# Altium PCB V4.pcbdoc
Units mil, origin at the board's own origin, x right, y up, seen from the top; angles counter-clockwise.
Board outline 3175 x 2617.79 mil, 2 copper layers (Top Layer, Bottom Layer); 52 components, 61 nets, 210 pads, 44 vias.
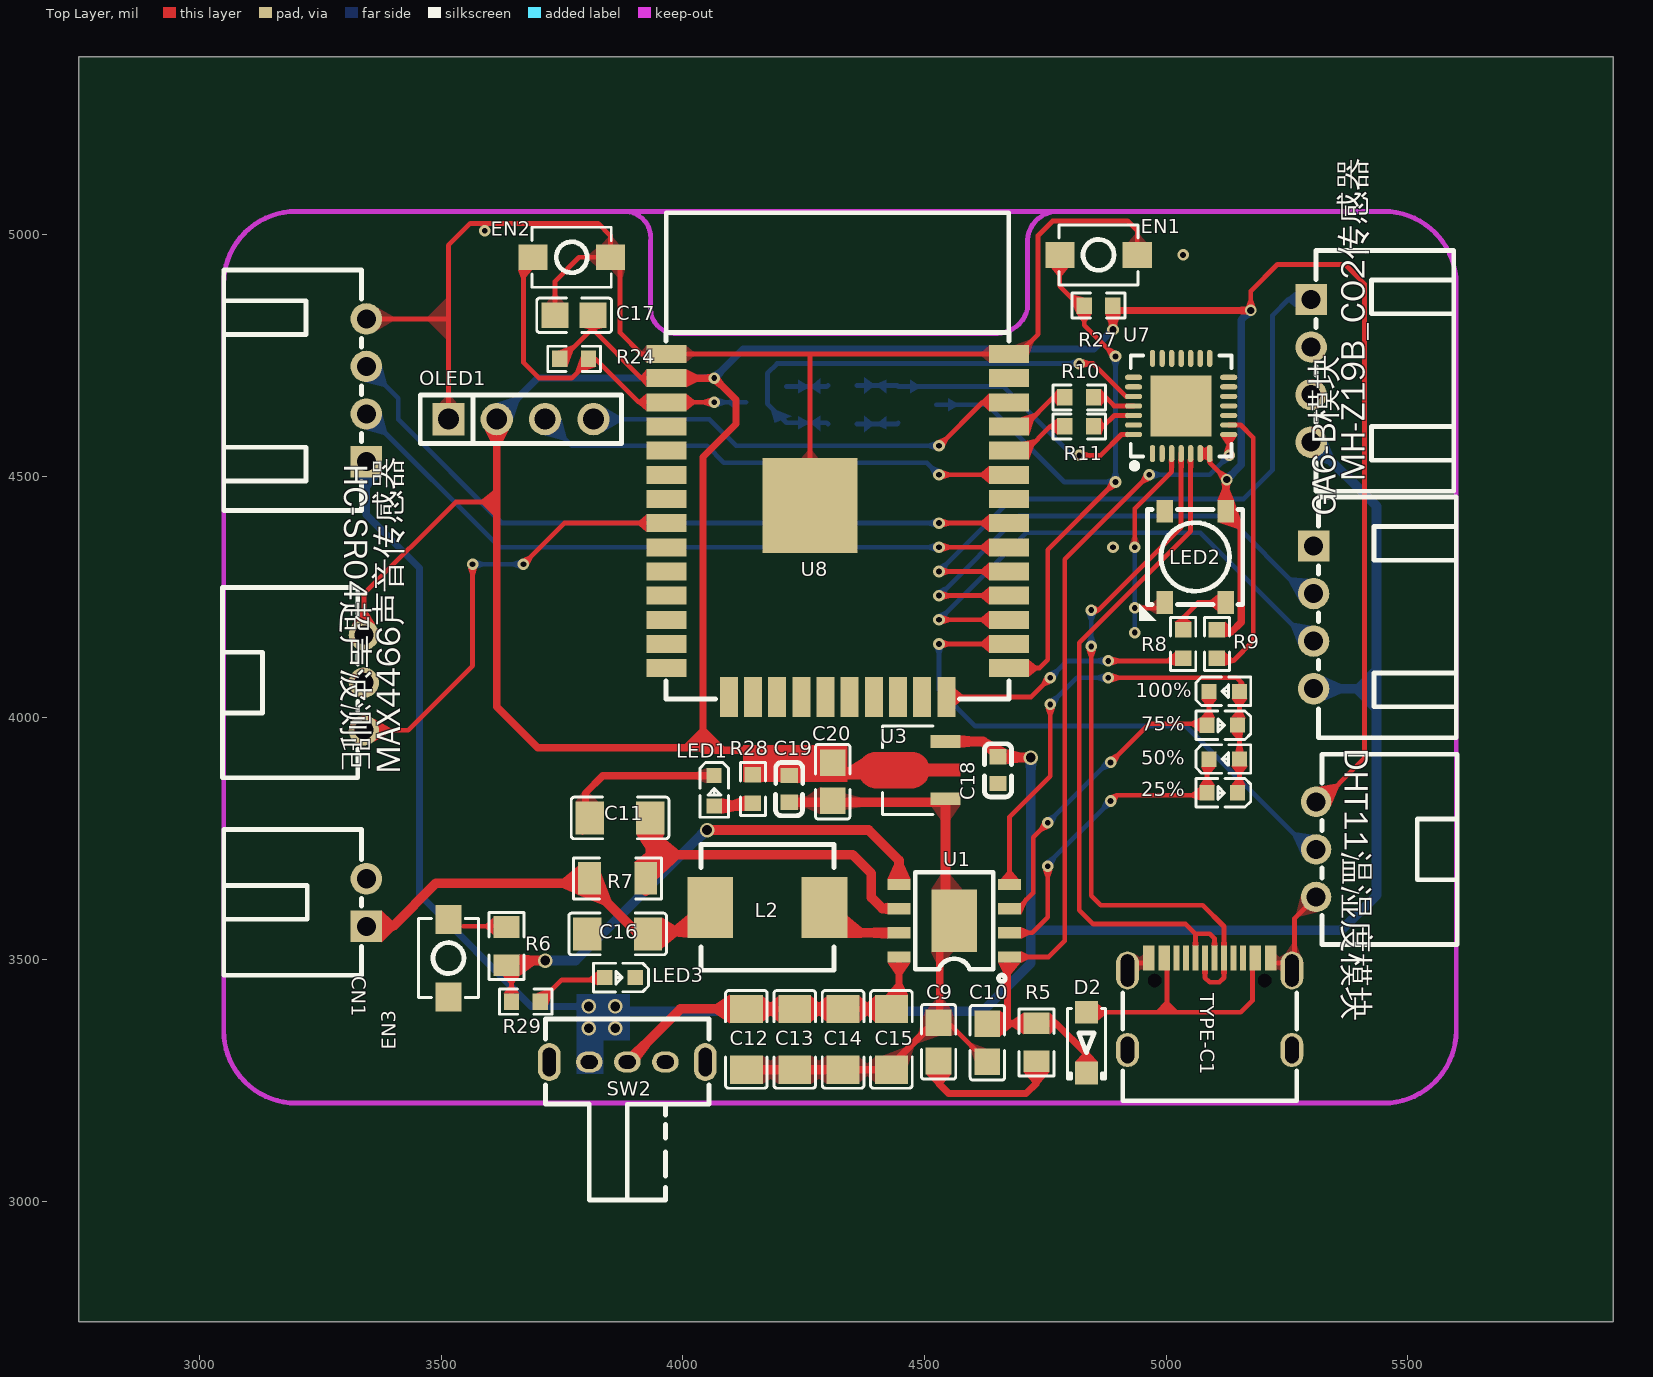
[diagram p0: Top Layer view]
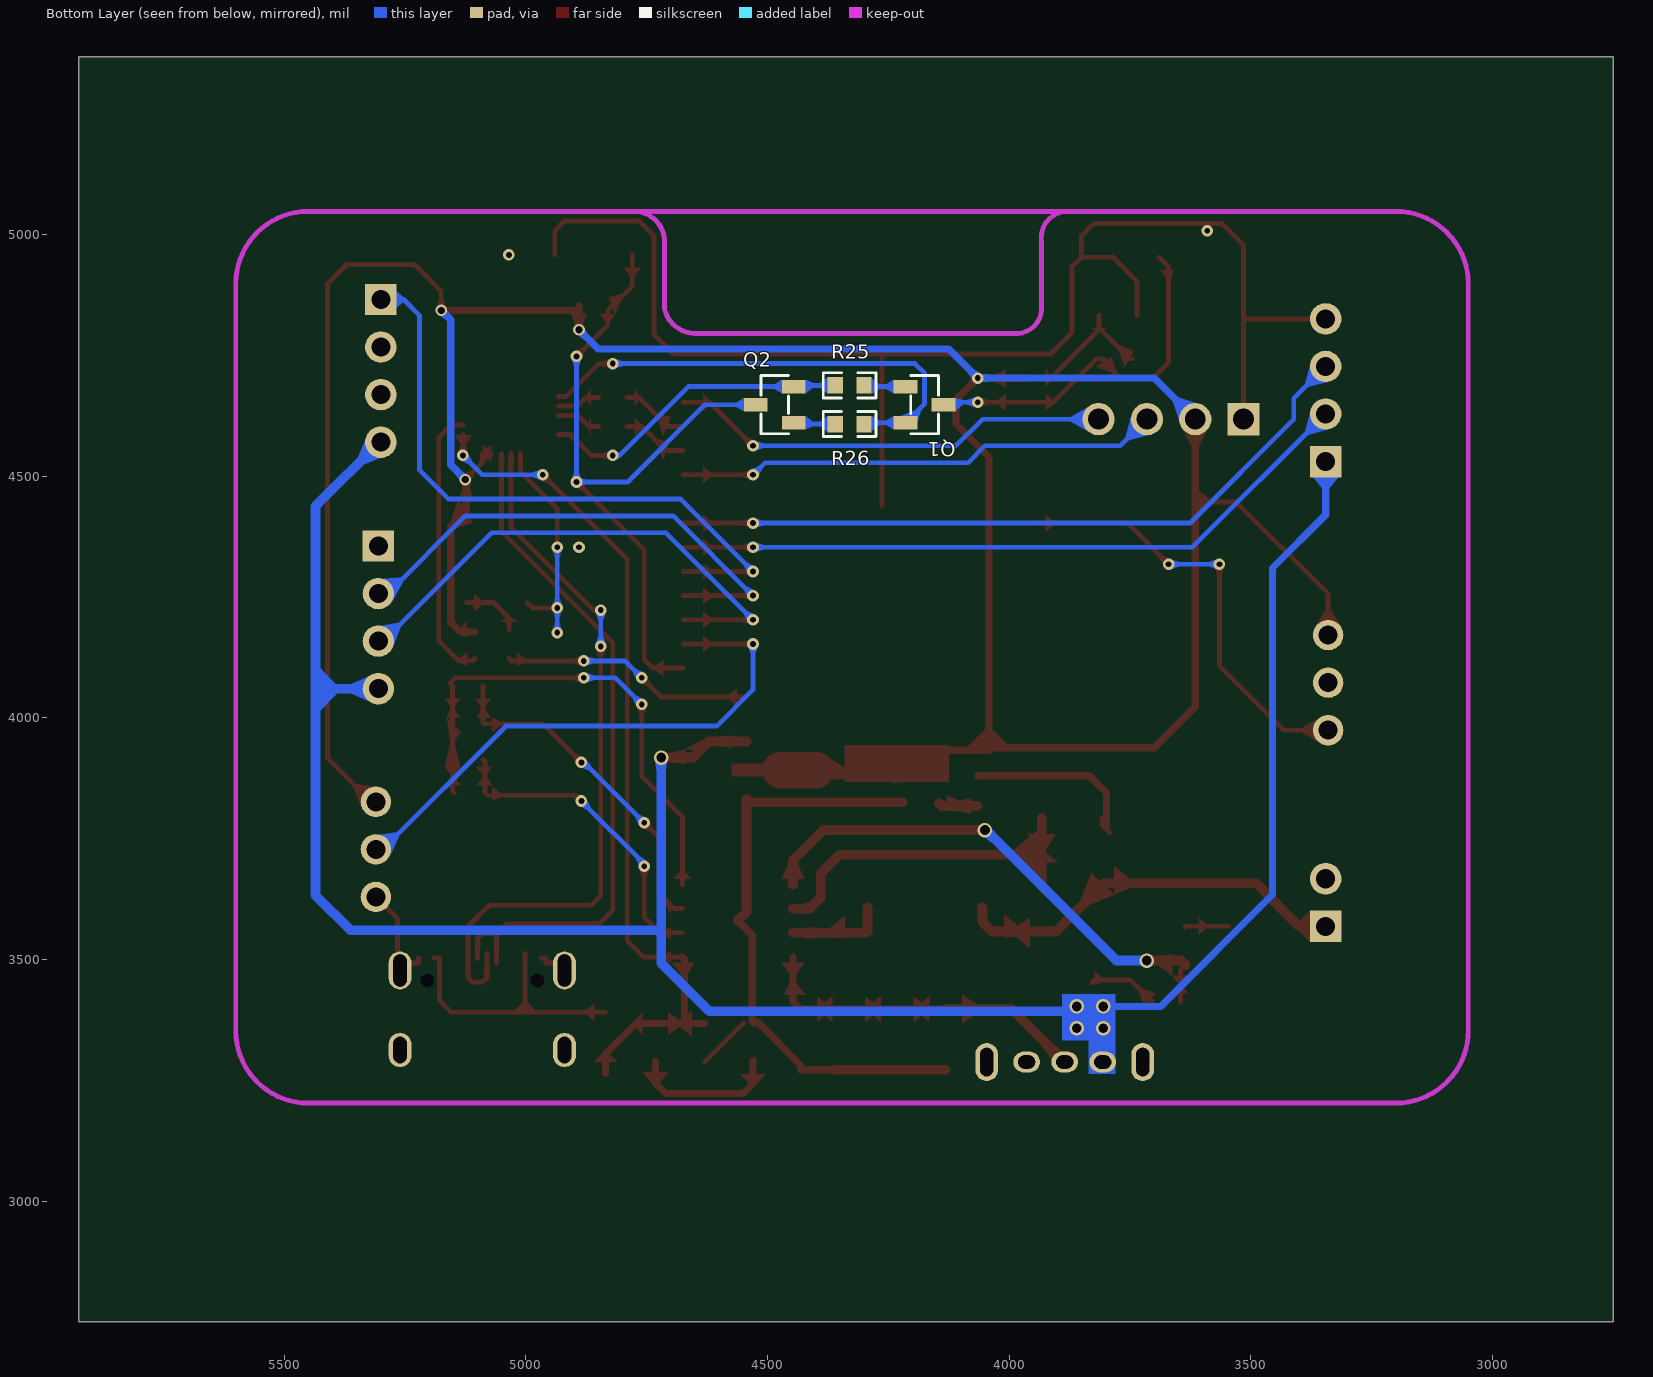
[diagram p1: Bottom Layer view, seen from below]

## Layer stack, top to bottom
Top Layer: signal copper (thickness not stored)
Dielectric: dielectric 12.6, FR-4, Dk 4.8
Bottom Layer: signal copper (thickness not stored)

## Board outline
5925,2750 2750,2750 2750,5367.79 5925,5367.79

## Components (designator, comment, footprint, x,y, rotation, side; value= is the part's Value field where it differs from the comment)
25% "19-217/GHC-YR1S2/3T" LED0603-RD 5116.1,3844.95 r180 top
50% "19-217/GHC-YR1S2/3T" LED0603-RD 5120,3914.53 r0 top
75% "19-217/GHC-YR1S2/3T" LED0603-RD 5116.1,3984.95 r180 top
100% "19-217/GHC-YR1S2/3T" LED0603-RD 5120,4054.53 r0 top
C9 "GRM21BR61H106KE43L" C0805 4529.07,3329.61 r270 top
C10 "GRM21BR61H106KE43L" C0805 4630,3327.79 r90 top
C11 "C3216X5R1V226MTJ00E" C1206 3870,3792.79 r0 top
C12 "C3216X5R1V226MTJ00E" C1206 4131.45,3334.61 r90 top
C13 "C3216X5R1V226MTJ00E" C1206 4231.45,3334.61 r90 top
C14 "C3216X5R1V226MTJ00E" C1206 4331.45,3334.61 r90 top
C15 "C3216X5R1V226MTJ00E" C1206 4431.45,3334.61 r90 top
C16 "C3216X5R1V226MTJ00E" C1206 3865,3552.79 r0 top
C17 "GRM21BR61H106KE43L" C0805 3775,4832.79 r180 top
C18 "104" C0603 4652.07,3891.75 r90 top
C19 "104" C0603 4220,3852.79 r90 top
C20 "GRM21BR61H106KE43L" C0805 4310,3867.79 r90 top
CN1 "HC-XHB-2AW_C2845505" CONN-TH_2P-P2.50_HCTL_HC-XHB-2AW 3345,3617.79 r270 top
D2 "SS14_C2909920" SOD-123FL_L2.8-W1.8-LS3.7-RD 4835,3327.79 r90 top
DHT11温湿度模块 "HC-XHB-3AW_C2845506" CONN-TH_3P-HC-XHB-3AW 5310,3727.79 r270 top
EN1 "TSA343G00-250J2" SW-SMD_L4.0-W2.9-LS5.0 4860,4957.79 r0 top
EN2 "TSA343G00-250J2" SW-SMD_L4.0-W2.9-LS5.0 3770,4952.79 r0 top
EN3 "TSA343G00-250J2" SW-SMD_L4.0-W2.9-LS5.0 3515,3502.79 r90 top
GA6-B模块 "HC-XHB-4AW" CONN-TH_4P-P2.5_HCTL_HC-XHB-4AW 5305,4207.79 r90 top
HC-SR04超声波测距 "HC-XHB-4AW" CONN-TH_4P-P2.5_HCTL_HC-XHB-4AW 3345,4677.79 r270 top
L2 "FXL0618-1R0-M" IND-SMD_L7.0-W6.6 4175,3607.79 r180 top
LED1 "19-217/GHC-YR1S2/3T" LED0603-RD 4064.58,3848.89 r270 top
LED2 "WS2812B-V5/W" LED-SMD_L5.0-W5.0-P3.20-LS5.4-TL 5060,4332.79 r270 top
LED3 "19-217/GHC-YR1S2/3T" LED0603-RD 3870,3462.79 r180 top
MAX4466声音传感器 "HC-XHB-3AW_C2845506" CONN-TH_3P-HC-XHB-3AW 3340,4072.79 r90 top
MH-Z19B_CO2传感器 "HC-XHB-4AW" CONN-TH_4P-P2.5_HCTL_HC-XHB-4AW 5300,4717.79 r90 top
OLED1 "2.54-1*4P母" HDR-TH_4P-P2.54-V-F 3665,4617.79 r0 top
Q1 "S8050" SOT-23-3_L2.9-W1.3-P1.90-LS2.4-BR 4175,4647.79 r0 bottom
Q2 "S8050" SOT-23-3_L2.9-W1.3-P1.90-LS2.4-BR 4485,4647.79 r180 bottom
R5 "0805W8F200KT5E" R0805 4731.88,3328.35 r90 top
R6 "0805W8F1002T5E_C17414" R0805 3635,3527.79 r270 top
R7 "1206W4F500LT5E" R1206 3865,3667.79 r180 top
R8 "0603WAF0000T5E" R0603 5035,4152.79 r270 top
R9 "0603WAF4701T5E" R0603 5105,4152.79 r270 top
R10 "0603WAF1001T5E" R0603 4820,4662.79 r180 top
R11 "0603WAF1001T5E" R0603 4820,4602.79 r180 top
R24 "0603WAF1002T5E" R0603 3775,4742.79 r0 top
R25 "0603WAF1002T5E" R0603 4330,4687.79 r0 bottom
R26 "0603WAF1002T5E" R0603 4330,4607.79 r180 bottom
R27 "0603WAF1002T5E" R0603 4860,4852.79 r0 top
R28 "0603WAF1001T5E" R0603 4145,3852.79 r90 top
R29 "0603WAF200JT5E" R0603 3675,3412.79 r180 top
SW2 "SK-12D02-VG5_C136722" SW-TH_SK-12D02-VG5 3885,3287.79 r0 top
TYPE-C1 "KH-TYPE-C-16P" USB-C-SMD_KH-TYPE-C-16P 5090,3407.79 r0 top
U1 "IP5306" ESOP-8_L4.9-W3.9-P1.27-LS6.0-BL-EP 4561.59,3580.2 r90 top
U3 "AMS1117-3.3_C880752" SOT-89-3_L4.5-W2.5-P1.50-LS4.2-BR 4489.95,3891.77 r0 top
U7 "CP2102-GMR" WQFN-28_L5.0-W5.0-P0.50-BL-EP3.2 5030.88,4645.2 r0 top
U8 "ESP32-WROOM-32D" WIFIM-SMD_ESP32-WROOM-32D 4320,4397.79 r270 top

## Footprints (in the part's own frame and the unit in brackets; to place one, negate y for a bottom-side part, rotate by r counter-clockwise, add the part's x,y. Pads: shape width x height; smd on the part's side, far side on the other; paste and mask are expansions set on the pad)
C0603 [mm]
  rect 0.8x0.9 smd paste+0 mask+0.051: 1(-0.7,0) 2(0.7,0)
  silkscreen extent -1.41,-0.71 1.39,0.72
C0805 [mm]
  rect 1.41x1.35 smd paste-100 mask+0.051: 1(-1,0) 2(1,0)
  silkscreen extent -1.96,-0.9 1.96,0.9
C1206 [mm]
  rect 1.485x1.728 smd paste-100 mask+0.051: 1(-1.593,0) 2(1.593,0)
  silkscreen extent -2.56,-1.09 2.56,1.09
CONN-TH_2P-P2.50_HCTL_HC-XHB-2AW [mm]
  rect 1.65x1.65 hole 1 paste+0 mask+0.05: 1(1.25,0)
  round 1.65 hole 1 paste+0 mask+0.05: 2(-1.25,0)
  silkscreen extent -3.84,-7.49 3.82,-0.25
CONN-TH_3P-HC-XHB-3AW [mm]
  round 1.6 hole 1 paste+0 mask+0.05: 1(-2.5,0) 2(0,0) 3(2.5,0)
  silkscreen extent -5,0.32 5,7.42
CONN-TH_4P-P2.5_HCTL_HC-XHB-4AW [mm]
  rect 1.65x1.65 hole 1 paste+0 mask+0.05: 1(3.75,0)
  round 1.65 hole 1 paste+0 mask+0.05: 2(1.25,0) 3(-1.25,0) 4(-3.75,0)
  silkscreen extent -6.32,-7.49 6.32,-0.25
ESOP-8_L4.9-W3.9-P1.27-LS6.0-BL-EP [mm]
  rect 0.6x1.2 smd paste+0 mask+0.051: 1(-1.905,-2.908) 2(-0.635,-2.908) 3(0.635,-2.908) 4(1.905,-2.908) 5(1.905,2.908) 6(0.635,2.908) 7(-0.635,2.908) 8(-1.905,2.908)
  rect 3.3x2.4 smd paste+0 mask+0.051: 9(0,0)
  silkscreen extent -3.2,-2.67 2.55,2.05
HDR-TH_4P-P2.54-V-F [mm]
  rect 1.7x1.7 hole 1.1 paste+0 mask+0.051: 1(-3.81,0)
  round 1.7 hole 1.1 paste+0 mask+0.051: 2(-1.27,0) 3(1.27,0) 4(3.81,0)
  silkscreen extent -5.29,-1.27 5.29,1.27
IND-SMD_L7.0-W6.6 [mm]
  rect 2.4x3.2 smd paste+0 mask+0.051: 1(-3,0) 2(3,0)
  silkscreen extent -3.5,-3.3 3.5,3.3
LED0603-RD [mm]
  rect 0.8x0.8 smd paste+0 mask+0.051: 1(-0.799,-0.003) 2(0.799,0.003)
  silkscreen extent -1.49,-0.75 1.39,0.76
LED-SMD_L5.0-W5.0-P3.20-LS5.4-TL [mm]
  rect 1.2x0.85 smd paste+0 mask+0.051: 1(-2.4,1.6) 2(-2.4,-1.6) 3(2.4,1.6) 4(2.4,-1.6)
  silkscreen extent -2.5,-2.95 3.35,2.5
R0603 [mil]
  rect 31.75x34.02 smd paste-3937.01 mask+2: 1(-29.66,0) 2(29.66,0)
  silkscreen extent -55,-26 55,26
R0805 [mm]
  rect 1.133x1.377 smd paste-100 mask+0.051: 1(-1,0) 2(1,0)
  silkscreen extent -1.76,-0.92 1.76,0.92
R1206 [mil]
  rect 47.54x66.97 smd paste-3937.01 mask+2: 1(-58.22,0) 2(58.22,0)
  silkscreen extent -91,-42 91,42
SOD-123FL_L2.8-W1.8-LS3.7-RD [mm]
  rect 1.2x1.2 smd paste+0 mask+0.051: 1(-1.6,0) 2(1.6,0)
  silkscreen extent -1.9,-1 1.8,1
SOT-23-3_L2.9-W1.3-P1.90-LS2.4-BR [mm]
  rect 1.25x0.7 smd paste+0 mask+0.051: 1(1,-0.95) 2(1,0.95) 3(-1,0)
  silkscreen extent -0.73,-1.53 0.73,1.53
SOT-89-3_L4.5-W2.5-P1.50-LS4.2-BR [mm]
  rect 1.575x0.672 smd paste+0 mask+0.051: 1(1.356,-1.5) 3(1.356,1.5)
  Top Layer region: -2.283,0.95 -0.429,0.95 -0.384,0.949 -0.34,0.946 -0.296,0.94 -0.252,0.933 -0.208,0.924 -0.165,0.912 -0.123,0.899 -0.081,0.884 -0.04,0.866 0,0.847 0.04,0.826 0.078,0.803 0.115,0.779 0.151,0.752 0.185,0.724 0.219,0.695 0.251,0.664 0.281,0.631 0.31,0.597 0.337,0.562 0.362,0.525 0.386,0.488 0.408,0.449 0.428,0.409 0.447,0.33 2.144,0.33 2.144,-0.33 0.447,-0.33 0.428,-0.409 0.408,-0.449 0.386,-0.488 0.362,-0.526 0.337,-0.562 0.31,-0.597 0.281,-0.631 0.251,-0.664 0.219,-0.695 0.185,-0.725 0.151,-0.753 0.115,-0.779 0.078,-0.804 0.04,-0.827 0,-0.848 -0.04,-0.867 -0.081,-0.884 -0.123,-0.899 -0.165,-0.913 -0.208,-0.924 -0.252,-0.934 -0.296,-0.941 -0.34,-0.946 -0.384,-0.949 -0.429,-0.95 -2.283,-0.95 -2.328,-0.949 -2.372,-0.946 -2.416,-0.941 -2.46,-0.934 -2.504,-0.924 -2.547,-0.913 -2.589,-0.899 -2.631,-0.884 -2.672,-0.867 -2.713,-0.848 -2.752,-0.827 -2.79,-0.804 -2.827,-0.779 -2.863,-0.753 -2.898,-0.725 -2.931,-0.695 -2.963,-0.664 -2.993,-0.631 -3.022,-0.597 -3.049,-0.562 -3.075,-0.526 -3.098,-0.488 -3.12,-0.449 -3.141,-0.409 -3.159,-0.369 -3.175,-0.327 -3.189,-0.285 -3.202,-0.242 -3.212,-0.199 -3.22,-0.155 -3.227,-0.111 -3.231,-0.067 -3.233,-0.022 -3.233,0.022 -3.231,0.067 -3.227,0.111 -3.22,0.155 -3.212,0.199 -3.202,0.242 -3.189,0.285 -3.175,0.327 -3.159,0.369 -3.141,0.409 -3.12,0.449 -3.098,0.488 -3.075,0.525 -3.049,0.562 -3.022,0.597 -2.993,0.631 -2.963,0.664 -2.931,0.695 -2.898,0.724 -2.863,0.752 -2.827,0.779 -2.79,0.803 -2.752,0.826 -2.713,0.847 -2.672,0.866 -2.631,0.884 -2.589,0.899 -2.547,0.912 -2.504,0.924 -2.46,0.933 -2.416,0.94 -2.372,0.946 -2.328,0.949
  silkscreen extent -1.95,-2.33 0.7,2.33
SW-SMD_L4.0-W2.9-LS5.0 [mm]
  rect 1.53x1.36 smd paste+0 mask+0.051: 1(-2.035,0) 2(2.035,0)
  silkscreen extent -2.08,-1.58 2.08,1.58
SW-TH_SK-12D02-VG5 [mm]
  oval 1.4x1.1 hole 0.7 slot 0.9 at 0 deg copper offset 0,0.001 paste+0 mask+0.051: 1(-2,-0.001)
  oval 1.4x1.1 hole 0.7 slot 0.9 at 0 deg paste+0 mask+0.051: 2(0,0)
  oval 1.4x1.1 hole 0.7 slot 0.9 at 0 deg copper offset 0,-0.001 paste+0 mask+0.051: 3(2,0.001)
  oval 1.2x2 hole 0.7 slot 1.5 at 90 deg copper offset 0.001,0 paste+0 mask+0.051: 4(4.099,0)
  oval 1.2x2 hole 0.7 slot 1.5 at 90 deg copper offset 0,0 paste+0 mask+0.051: 5(-4.1,0)
  silkscreen extent -4.3,-7.25 4.3,2.27
USB-C-SMD_KH-TYPE-C-16P [mm]
  oval 1.2x2 hole 0.7 slot 1.7 at 90 deg paste+0 mask+0.051: 1(-4.32,1.765) 2(4.32,1.765)
  oval 1.2x1.8 hole 0.7 slot 1.4 at 90 deg paste+0 mask+0.051: 3(-4.32,-2.415) 4(4.32,-2.415)
  rect 0.3x1.3 smd paste-100 mask+0.05: A1(-3.35,2.415) A4(-2.55,2.415) A5(-1.25,2.415) A6(-0.25,2.415) A7(0.25,2.415) A8(1.25,2.415) A9(2.55,2.415) A12(3.35,2.415) B1(3.05,2.415) B4(2.25,2.415) B5(1.75,2.415) B6(0.75,2.415) B7(-0.75,2.415) B8(-1.75,2.415) B9(-2.25,2.415) B12(-3.05,2.415)
  Multi-Layer board cut-out: -2.54,1.235 -2.575,1.387 -2.672,1.509 -2.812,1.576 -2.968,1.576 -3.108,1.509 -3.205,1.387 -3.24,1.235 -3.24,1.235 -3.205,1.083 -3.108,0.961 -2.968,0.894 -2.812,0.894 -2.672,0.961 -2.575,1.083 -2.54,1.235
  Multi-Layer board cut-out: 3.24,1.235 3.205,1.387 3.108,1.509 2.968,1.576 2.812,1.576 2.672,1.509 2.575,1.387 2.54,1.235 2.54,1.235 2.575,1.083 2.672,0.961 2.812,0.894 2.968,0.894 3.108,0.961 3.205,1.083 3.24,1.235
  silkscreen extent -4.57,-5.08 4.57,0.57
WIFIM-SMD_ESP32-WROOM-32D [mm]
  rect 0.95x2.1 smd paste+0 mask+0.051: 1(-9.015,-9) 2(-7.745,-9) 3(-6.475,-9) 4(-5.205,-9) 5(-3.935,-9) 6(-2.665,-9) 7(-1.395,-9) 8(-0.125,-9) 9(1.145,-9) 10(2.415,-9) 11(3.685,-9) 12(4.955,-9) 13(6.225,-9) 14(7.495,-9) 25(7.495,9) 26(6.225,9) 27(4.955,9) 28(3.685,9) 29(2.415,9) 30(1.145,9) 31(-0.125,9) 32(-1.395,9) 33(-2.665,9) 34(-3.935,9) 35(-5.205,9) 36(-6.475,9) 37(-7.745,9) 38(-9.015,9)
  rect 2.1x0.95 smd paste+0 mask+0.051: 15(9.015,-5.715) 16(9.015,-4.445) 17(9.015,-3.175) 18(9.015,-1.905) 19(9.015,-0.635) 20(9.015,0.635) 21(9.015,1.905) 22(9.015,3.175) 23(9.015,4.445) 24(9.015,5.715)
  rect 5x5 smd paste+0 mask+0.051: 39(-1.045,-1.45)
  silkscreen extent -16.44,-9.02 9.12,9.02
WQFN-28_L5.0-W5.0-P0.50-BL-EP3.2 [mm]
  oval 0.28x0.9 smd paste-100 mask+0.051: 1(-1.501,-2.5) 2(-1.001,-2.5) 3(-0.501,-2.5) 4(0,-2.5) 5(0.5,-2.5) 6(1.001,-2.5) 7(1.501,-2.5) 15(1.501,2.5) 16(1.001,2.5) 17(0.5,2.5) 18(0,2.5) 19(-0.501,2.5) 20(-1.001,2.5) 21(-1.501,2.5)
  oval 0.9x0.28 smd paste-100 mask+0.051: 8(2.5,-1.501) 9(2.5,-1.001) 10(2.5,-0.501) 11(2.5,0) 12(2.5,0.5) 13(2.5,1.001) 14(2.5,1.501) 22(-2.5,1.501) 23(-2.5,1.001) 24(-2.5,0.5) 25(-2.5,0) 26(-2.5,-0.501) 27(-2.5,-1.001) 28(-2.5,-1.501)
  rect 3.2x3.2 smd paste-100 mask+0.051: 29(0,0)
  silkscreen extent -2.65,-3.3 2.65,2.65

## Via types
v1: diameter 24, hole 12, Top Layer to Bottom Layer, 32 vias
v2: diameter 30, hole 20, Top Layer to Bottom Layer, 7 vias
v3: diameter 24, hole 15, Top Layer to Bottom Layer, 3 vias
v4: diameter 24.02, hole 12.01, Top Layer to Bottom Layer, 2 vias

## Nets (pads, with @x,y where several pads share a name; then routed paths per layer and width w, separated by ;. In a path a pad name is that pad's centre, name@x,y a point inside that pad or via, vN(x,y) a via of type N, cw(c..) or ccw(c..) an arc to the next point about the centre after c; other vN are vias at no path point)
3V3: C17.1 C19.2 C20.2 DHT11温湿度模块.1 LED2.1 MAX4466声音传感器.3 OLED1.2 R9.1 R24.1 R27.2 R28.2 U7.6 U7.7 U8.2 | length 7104.2
  Top Layer w10: MAX4466声音传感器.3 3340,4256.22 3530,4446.22 3615,4446.22 ; R24.1 3750.34,4742.79 C17.1@3814.37,4806.82 ; C17.1 C17.1@3814.37,4806.82 ; U8.2 3914.33,4702.72 3814.37,4802.68 C17.1@3814.37,4806.82 ; U7.6 U7.7 5089.97,4527.82 v3(5125,4492.79) ; v3(5175,4842.79) 5175,4882.79 5230,4937.79 5370,4937.79 5410,4897.79 5410,3916.22 DHT11温湿度模块.1@5305,3811.22
  Top Layer w15: OLED1.2 3615,4446.22 3615,4022.79 3700,3937.79 4036.79,3937.79 4041.79,3932.79 ; U8.2 4064.93,4702.72 v1(4065,4702.79) 4110,4657.79 4110,4607.79 4041.79,4539.59 4041.79,3932.79 ; 4160,3932.79 4041.79,3932.79 ; R27.2 R27.2@4889.66,4842.79 ; v3(4890,4802.79) 4889.66,4803.13 R27.2@4889.66,4842.79 ; R9.1@5105,4177.45 5135,4177.45 5155,4197.45 5155,4395.27 LED2.1 5122.99,4490.78 v3(5125,4492.79) ; v3(5175,4842.79) R27.2@4889.66,4842.79
  Top Layer w20: R28.2 4427.24,3882.45 4436.56,3891.76
  Bottom Layer w15: OLED1.2 3700,4702.79 v1(4065,4702.79) 4125,4762.79 4850,4762.79 v3(4890,4802.79) ; v3(5125,4492.79) 5155.48,4523.28 5155.48,4823.28 v3(5175,4842.79)
5V: C10.2 D2.1 R5.2 U1.1 U7.8 | length 1805.2
  Top Layer w10: U1.1 4756.71,3505.2 4790,3538.49 4790,4327.79 v1(4965,4502.79) ; U7.8 5129.3,4537.79 5130,4538.49 v1(5130,4542.79)
  Top Layer w15: C10.2 4630.56,3367.72 R5.2 4772.07,3367.72 4835,3304.8 D2.1 ; 4671.88,3372.72 4671.88,3501 U1.1
  Bottom Layer w10: v1(4965,4502.79) 5090,4502.79 v1(5130,4542.79)
$1N562: C11.2 R7.1 U1.6 | length 747.1
  Top Layer w20: R7.1@3923.22,3641.01 3932.7,3650.49 3932.7,3720.49 ; C11.2 3932.7,3720.49 ; U1.6 4412.59,3605.2 4390,3627.79 4390,3677.79 4350.98,3716.81 3936.38,3716.81 3932.7,3720.49
$1N563: L2.1 U1.7 | length 205.1
  Top Layer w20: L2.1 4293.11,3557.79 4295.69,3555.2 U1.7
$1N566: C9.2 R5.1 | length 311.4
  Top Layer w15: C9.2 4530,3289.31 4530,3242.79 4550,3222.79 4710,3222.79 4731.88,3244.67 R5.1
$1N567: 25%.2 50%.1 U1.2 | length 656.2
  Top Layer w10: U1.2 4722.41,3555.2 4755,3587.79 v1(4755,3692.79) ; v1(4885,3827.79) 4897.03,3839.82 25%.2@5078.72,3839.82 ; 25%.2 5084.62,3910.49 50%.1
  Bottom Layer w10: v1(4755,3692.79) 4755,3697.79 v1(4885,3827.79)
$1N568: 75%.2 100%.1 U1.3 | length 714.8
  Top Layer w10: U1.3 4692.41,3605.2 4725,3637.79 4725,3752.79 v1(4755,3782.79) ; v1(4885,3907.79) 4965,3987.79 5086.7,3987.79 75%.2@5088.72,3989.82 ; 75%.2@5088.52,3989.82 100%.1 100%.1@5088.52,4065.29
  Bottom Layer w10: v1(4755,3782.79) 4880,3907.79 v1(4885,3907.79)
$1N569: 25%.1 50%.2 75%.1 100%.2 U1.4 | length 1062.2
  Top Layer w10: U1.4 4676.09,3795.2 4760,3879.11 v1(4760,4027.79) ; v1(4880,4082.79) 5145.58,4082.79 5157.14,4071.23 5151.67,4065.76 5151.67,3849.19 25%.1
  Bottom Layer w10: v1(4760,4027.79) 4815,4082.79 v1(4880,4082.79)
$1N4383: R9.2 U7.9 | length 576.3
  Top Layer w10: R9.2 5110,4118.13 5139.14,4118.13 5180,4158.99 5180,4579.82 5154.02,4605.8 U7.9
$1N4471: R10.1 U7.25 | length 90.1
  Top Layer w10: R10.1 4874.66,4662.79 4892.25,4645.2 U7.25
$1N4541: R11.1 U7.26 | length 92.2
  Top Layer w10: R11.1 4869.66,4602.79 4892.37,4625.5 U7.26
$1N5646: Q1.1 R25.1 | length 87
  Bottom Layer w10: Q1.1 4297.74,4685.19 R25.1
$1N5682: Q2.1 R26.1 | length 87
  Bottom Layer w10: R26.1 4443.03,4607.79 Q2.1
$1N8242: LED1.2 R28.1 | length 82.7
  Top Layer w20: LED1.2 4139.28,3817.41 R28.1
$1N8352: LED2.3 R8.1 | length 125.8
  Top Layer w10: R8.1 5035,4207.45 5065.85,4238.3 LED2.3
$1N18037: EN3.2 R6.1 | length 91.1
  Top Layer w10: 3545.51,3568.74 3635,3568.74 R6.1
$1N20998: LED3.2 R29.1 | length 144.6
  Top Layer w10: R29.1 3749.66,3457.79 3823.39,3457.79 LED3.2@3828.53,3452.66
$1N21037: R6.2 R29.2 U1.5 | length 1083.6
  Top Layer w10: R6.2 3645.34,3478.08 R29.2
  Top Layer w20: R6.2 3644.37,3497.79 v2(3715,3497.79) ; v2(4050,3767.79) 4384.5,3767.79 4447.09,3705.2 U1.5
  Bottom Layer w20: v2(3715,3497.79) 3778.28,3497.79 4048.28,3767.79 v2(4050,3767.79)
$1N21123: C12.2 C13.2 C14.2 C15.2 SW2.2 U1.8 | length 706.6
  Top Layer w15: C12.2 C13.2 C14.2 C15.2 4447.09,3412.95 U1.8
  Top Layer w20: SW2.2 3995.01,3397.79 4130.97,3397.79 C12.2
CLK: U8.20
CMD: U8.19
D+: TYPE-C1.A6 TYPE-C1.B6 U7.4 | length 1504.4
  Top Layer w10: v4(4845,4147.79) 4845,3632.24 4864.92,3612.32 5075.47,3612.32 5119.53,3568.26 TYPE-C1.B6 5119.53,3462.32 5110,3452.79 5090,3452.79 5080.16,3462.63 TYPE-C1.A6@5080.16,3512.87 ; v4(4845,4222.79) 4859.14,4222.79 5030.87,4394.52 U7.4
  Bottom Layer w10: v4(4845,4147.79) v4(4845,4222.79)
D-: TYPE-C1.A7 TYPE-C1.B7 U7.5 | length 1444.9
  Top Layer w10: U7.5 5050.57,4385.88 4820,4155.31 4820,3602.26 4849,3573.26 5040.47,3573.26 5060.47,3553.26 ; TYPE-C1.B7@5060.47,3492.87 5060.47,3553.26 ; TYPE-C1.A7@5100,3503.18 5100,3543.26 5090,3553.26 5060.47,3553.26
DTR: Q2.2 R25.2 U7.28 | length 650.8
  Top Layer w10: v1(4820,4542.79) 4864.15,4542.79 4907.45,4586.1 U7.28
  Bottom Layer w10: R25.2 4443.03,4687.79 Q2.2 4663.46,4685.19 4805.86,4542.79 v1(4820,4542.79)
EN: EN2.1 Q1.3 R24.2 U8.3 | length 751.6
  Top Layer w10: EN2.1 3670,4932.91 3670,4735.33 3702.54,4702.79 3769.66,4702.79 3804.66,4737.79 R24.2 3818.8,4742.79 3908.88,4652.72 U8.3 v1@4060,4652.72
  Bottom Layer w10: v1(4065,4652.79) Q1.3@4130.63,4652.79
GND: C9.1 C10.1 C11.1 C12.1 C13.1 C14.1 C15.1 C16.1 C17.2 C18.1 C19.1 C20.1 CN1.2 DHT11温湿度模块.3 EN1.2 EN2.2 EN3.1 GA6-B模块.1 HC-SR04超声波测距.4 LED1.1 LED2.4 LED3.1 MAX4466声音传感器.2 MH-Z19B_CO2传感器.3 OLED1.1 TYPE-C1.1 TYPE-C1.2 TYPE-C1.3 TYPE-C1.4 TYPE-C1.A1 TYPE-C1.A12 TYPE-C1.B1 TYPE-C1.B12 U1.9 U3.1 U7.3 U8.1 U8.15 U8.38 U8.39 | length 5506.8
  Top Layer w10: HC-SR04超声波测距.4 3515,4825.43 ; OLED1.1 3515,4825.43 ; C17.2 3735.63,4903.3 3785.12,4952.79 EN2.2 ; C11.1@3792.3,3762.79 3807.3,3777.79 C11.1 ; U8.39 4262.93,4752.24 4262.44,4752.72 ; C9.1@4549.44,3368.98 C10.1 ; TYPE-C1.1 4935.51,3492.87 4958.11,3492.87 TYPE-C1.A1 TYPE-C1.B12@4968.11,3502.87 ; v1(4935,4227.31) 4986.02,4227.31 LED2.4 ; v1(4935,4352.79) 4935,4432.79 5011.17,4508.97 U7.3 ; EN1.2 4940,4957.91 4940,5007.79 4920,5027.79 4765,5027.79 4735,4997.79 4735,4793.39 4694.32,4752.72 U8.38 4262.44,4752.72 ; TYPE-C1.A12 5221.89,3492.87 5245.67,3492.87 TYPE-C1.2@5250.08,3497.28 ; TYPE-C1.2@5270.08,3477.28 TYPE-C1.2@5250.08,3497.28 ; DHT11温湿度模块.3@5305,3624.37 5265.08,3584.45 5265.08,3512.28 TYPE-C1.2@5250.08,3497.28 ; 3515,4825.43 3515,4977.79 3560,5022.79 3825,5022.79 3850.12,4997.67 EN2.2 ; EN2.2 3870.12,4932.79 3870.12,4796.9 3914.3,4752.72 U8.1 4262.44,4752.72
  Top Layer w15: C11.1@3798.54,3777.79 3798.54,3844.46 3834.44,3880.36 LED1.1 ; C14.1@4360.49,3271.91 C15.1 4431.45,3281.91 4518.52,3368.98 C9.1 4531.59,3371.51 4531.59,3550.2 U1.9
  Top Layer w20: C12.1 C13.1 C14.1@4360.49,3271.91 ; C19.1 4535.86,3825.23 U3.1 4543.35,3598.45 U1.9
  Bottom Layer w10: v1(4935,4176.25) v1(4935,4227.31) v1(4935,4352.79)
  other v1: 4890,4352.79 5035,4957.79 3590,5007.79
IO0: EN1.1 Q2.3 R27.1 U8.25 | length 1468.2
  Top Layer w10: U8.25 4737.66,4102.72 4755,4120.05 4755,4347.79 v1(4895,4487.79) ; EN1.1 4779.88,4893.25 4830.34,4842.79 4830.34,4812.45 v1(4895,4747.79)
  Bottom Layer w10: Q2.3 4629.37,4647.79 4789.37,4487.79 v1(4895,4487.79) v1(4895,4747.79)
IO2: R8.2 U8.24 | length 523.2
  Top Layer w10: U8.24 4720.09,4042.88 v1(4760,4082.79) ; v1(4880,4117.79) 5029.66,4117.79 R8.2
  Bottom Layer w10: v1(4760,4082.79) 4795,4117.79 v1(4880,4117.79)
IO4: DHT11温湿度模块.2 U8.26 | length 1156
  Top Layer w10: v1(4530,4152.79) 4674.25,4152.79 U8.26
  Bottom Layer w10: v1(4530,4152.79) 4530,4057.79 4605,3982.79 5040.86,3982.79 5295.86,3727.8 DHT11温湿度模块.2
IO5: MH-Z19B_CO2传感器.1 U8.29 | length 1334.9
  Top Layer w10: v1(4530,4302.79) 4674.25,4302.79 U8.29
  Bottom Layer w10: v1(4530,4302.79) 4680,4452.79 5160,4452.79 5220,4512.79 5220,4832.79 5252.64,4865.43 MH-Z19B_CO2传感器.1
IO12: U8.14
IO13: U8.16
IO14: U8.13
IO15: U8.23
IO16: GA6-B模块.3 U8.27 | length 1086.8
  Top Layer w10: v1(4530,4202.79) 4530.07,4202.72 U8.27
  Bottom Layer w10: v1(4530,4202.79) 4710,4382.79 5070.78,4382.79 5294.99,4158.58 GA6-B模块.3
IO17: GA6-B模块.2 U8.28 | length 1054.3
  Top Layer w10: v1(4530,4252.79) 4674.25,4252.79 U8.28
  Bottom Layer w10: v1(4530,4252.79) 4695,4417.79 5125,4417.79 5285.79,4257 GA6-B模块.2
IO18: HC-SR04超声波测距.2 U8.30 | length 1443.6
  Top Layer w10: v1(4530,4352.79) 4674.25,4352.79 U8.30
  Bottom Layer w10: HC-SR04超声波测距.2 3620.8,4352.79 v1(4530,4352.79)
IO19: HC-SR04超声波测距.3 U8.31 | length 1489.1
  Top Layer w10: v1(4530,4402.79) 4674.25,4402.79 U8.31
  Bottom Layer w10: HC-SR04超声波测距.3 3411.27,4660.73 3411.27,4617.32 3625.8,4402.79 v1(4530,4402.79)
IO21: OLED1.3 U8.33 | length 1007
  Top Layer w10: v1(4530,4502.79) 4674.25,4502.79 U8.33
  Bottom Layer w10: OLED1.3 3770,4562.79 4050,4562.79 4085,4527.79 4505,4527.79 v1(4530,4502.79)
IO22: OLED1.4 U8.36 | length 919.4
  Top Layer w10: v1(4530,4562.79) 4619.93,4652.72 U8.36
  Bottom Layer w10: OLED1.4 4055,4617.79 4110,4562.79 v1(4530,4562.79)
IO23: U8.37
IO25: U8.10
IO26: U8.11
IO27: U8.12
IO32: MAX4466声音传感器.1 U8.8 | length 926.2
  Top Layer w10: MAX4466声音传感器.1 3431.57,3974.37 3565,4107.79 v1(3565,4317.79) ; v1(3670,4317.79) 3755,4402.79 3965.6,4402.79 U8.8
  Bottom Layer w10: v1(3565,4317.79) v1(3670,4317.79)
IO33: U8.9
IO34: U8.6
IO35: U8.7
RTS: Q1.2 R26.2 U7.24 | length 999.6
  Top Layer w10: v1(4820,4732.79) 4848.73,4732.79 4916.62,4664.9 U7.24
  Bottom Layer w10: R26.2 4297.74,4610.39 Q1.2 4175,4649.76 4175,4712.79 4195,4732.79 v1(4820,4732.79)
RXD0: R11.2 U8.34 | length 136.8
  Top Layer w10: U8.34 4710.27,4552.72 4760.34,4602.79 R11.2
SD0: U8.21
SD1: U8.22
SD2: U8.17
SD3: U8.18
TXD0: R10.2 U8.35 | length 140.9
  Top Layer w10: U8.35 4706.12,4602.72 4766.2,4662.79 R10.2
VBUS: D2.2 TYPE-C1.A4 TYPE-C1.A9 TYPE-C1.B4 TYPE-C1.B9 | length 575.2
  Top Layer w10: D2.2 5001.42,3390.79 ; TYPE-C1.B9@5001.42,3512.87 5001.42,3390.79 ; TYPE-C1.A9 TYPE-C1.B4 5178.58,3415.3 5154.06,3390.79 5001.42,3390.79
VCCBAT: C16.2 CN1.1 L2.2 R7.2 | length 847.4
  Top Layer w20: CN1.1@3324.99,3568.58 3399.99,3568.58 3489.21,3657.79 3802.7,3657.79 3902.7,3557.79 4035,3557.79 4055,3577.79 4055,3605.91 L2.2
VIN: C18.2 GA6-B模块.4 HC-SR04超声波测距.1 MH-Z19B_CO2传感器.4 SW2.1 U3.3 | length 4894.5
  Top Layer w20: U3.3 4621.35,3950.82 4652.07,3920.1 C18.2 4653.6,3917.79 v2(4720,3917.79)
  Bottom Layer w15: HC-SR04超声波测距.1 3345,4419.85 3455,4309.85 3455,3634.31 3686.52,3402.79 v2(3805,3402.79) v2(3860,3402.79) v2@3860,3392.79 ; SW2.1 3806.26,3337.79
  Bottom Layer w20: v2@3860,3392.79 4620,3392.79 4720,3492.79 4720,3560.54 ; v2(4720,3917.79) 4720,3560.54 ; MH-Z19B_CO2传感器.4@5299.99,4572.8 5435,4437.79 5435,4070.15 ; GA6-B模块.4@5305,4060.15 5425,4060.15 5435,4070.15 ; 4720,3560.54 5362.75,3560.54 5435,3632.79 5435,4070.15
  other v2: 3805,3357.79 3860,3357.79
VN: U8.5
VP: U8.4
"": LED2.2 MH-Z19B_CO2传感器.2 SW2.3 SW2.4 SW2.5 TYPE-C1.A5 TYPE-C1.A8 TYPE-C1.B5 TYPE-C1.B8 U7.1 U7.2 U7.10 U7.11 U7.12 U7.13 U7.14 U7.15 U7.16 U7.17 U7.18 U7.19 U7.20 U7.21 U7.22 U7.23 U7.27 U7.29 U8.32

## Polygon pours and split planes (outlines as drawn)
GND on Top Layer (solid, remove dead copper, pour order 0): 3000,3132.79 5675,3132.79 5675,5107.79 3000,5107.79
GND on Bottom Layer (solid, remove dead copper, pour order 1): 3000,3127.79 5675,3127.79 5675,5117.79 3000,5117.79

## Keep-outs
Board Outline Layer:
  lines w10 net "": 3875,5047.79 cw(c3878.75,4993.19) 3932.88,4985.17 3932.88,4845.17 ccw(c3985.52,4847.71) 3988.55,4795.1 ; 3987.88,4795.1 4647.88,4795.1 ; 4642.88,4795.17 ccw(c4647.98,4862.04) 4712.88,4845.17 ; 4712.88,4845.53 4712.88,4985.53 ; 4712.88,4980.17 cw(c4775.92,4984.61) 4775,5047.79 ; 3050,3352.79 ccw(c3200,3352.79) 3200,3202.79 5450,3202.79 ccw(c5450,3352.79) 5600,3352.79 5600,4897.79 ccw(c5450,4897.79) 5450,5047.79 3200,5047.79 ccw(c3200,4897.79) 3050,4897.79 3050,3352.79

## Other copper
Top Layer:
  region net 3V3: 4125,3867.79 4340,3867.79 4340,3942.79 4125,3942.79
  region net 3V3: 3991.28,3932.79 4041.79,3983.31 4041.79,3983.81 4092.81,3932.79
  region net 3V3: 3580,4447.79 3615,4476.39 3615,4411.85 3584.83,4442.02
  region net VBUS: 4975.87,3390.79 5001.42,3416.34 5001.42,3416.35 5026.98,3390.79
  region net $1N562: 3930,3775.22 3998.34,3719.59 3998.34,3714.24 3927.7,3647.92
  region net $1N566: 4522.5,3242.79 4537.5,3242.79 4555.64,3262.49 4503.75,3262.49
  region net 5V: 4679.07,3360.22 4679.07,3375.22 4656.57,3393.97 4656.57,3341.47
  region net 5V: 4682.28,3360.22 4704.78,3345.43 4704.78,3390.02 4682.28,3375.22
  region net 5V: 4772.07,3360.22 4772.07,3375.22 4758.99,3390.02 4758.99,3345.43
  region net $1N566: 4739.38,3244.67 4758.13,3266.69 4705.63,3266.69 4724.38,3244.67
  region net $1N567: 5053.87,3844.82 5053.87,3834.82 5068.87,3829.07 5068.87,3857.32
  region net $1N567: 5079.62,3875.57 5068.87,3860.57 5100.37,3860.57 5089.62,3875.57
  region net $1N569: 5156.67,3875.84 5146.67,3875.84 5134.17,3860.84 5163.32,3860.84
  region net $1N569: 5156.67,3945.41 5146.67,3945.41 5135.73,3898.92 5167.22,3898.92
  region net $1N569: 5156.67,3883.92 5167.22,3898.92 5135.73,3898.92 5146.67,3883.92
  region net $1N567: 5079.62,3883.65 5089.62,3883.65 5102.12,3898.65 5072.78,3898.65
  region net $1N568: 5053.87,3992.79 5053.87,3982.79 5068.87,3970.29 5068.87,4000.57
  region net $1N568: 5083.52,4015.57 5071.02,4000.57 5100.37,4000.57 5093.52,4015.57
  region net $1N569: 5156.67,4015.84 5146.67,4015.84 5134.17,4000.84 5163.32,4000.84
  region net $1N569: 5156.67,3954.34 5163.32,4000.84 5134.17,3969.34 5146.67,3954.34
  region net $1N569: 5156.67,4023.92 5167.22,4038.92 5135.73,4038.92 5146.67,4023.92
  region net $1N568: 5083.52,4023.65 5093.52,4023.65 5104.27,4038.65 5072.78,4038.65
  region net 5V: 4664.38,3470.89 4679.38,3470.89 4698.13,3493.39 4652.47,3493.39
  region net 5V: 4714.71,3510.2 4699.71,3517.01 4699.71,3493.39 4714.71,3500.2
  region net $1N567: 4714.71,3550.2 4714.71,3560.2 4699.71,3567.01 4699.71,3543.39
  region net $1N568: 4710.32,3616.04 4707.76,3627.62 4699.71,3617.01 4699.71,3593.39
  region net $1N569: 4671.09,3682.01 4658.59,3667.01 4693.59,3667.01 4681.09,3682.01
  region net $1N21037: 4457.09,3697.01 4437.09,3697.01 4423.47,3667.01 4470.71,3667.01
  region net $1N562: 4412.59,3615.2 4412.59,3595.2 4423.47,3593.39 4423.47,3617.01
  region net $1N563: 4393.47,3565.2 4393.47,3545.2 4423.47,3543.39 4423.47,3567.01
  region net $1N21123: 4454.59,3470.89 4470.71,3493.39 4423.47,3493.39 4439.59,3470.89
  region net $1N21037: 3692.11,3487.79 3692.11,3507.79 3662.11,3510.72 3662.11,3466.13
  region net $1N21037: 3640.34,3451.13 3650.34,3451.13 3662.11,3466.13 3627.84,3466.13
  region net $1N18037: 3592.89,3573.74 3592.89,3563.74 3607.89,3551.24 3607.89,3586.24
  region net $1N562: 3942.7,3728.78 3961.93,3758.78 3903.47,3758.78 3922.7,3728.78
  region net $1N21123: 4187.97,3404.81 4165.47,3423.56 4165.47,3371.06 4187.97,3389.81
  region net $1N21123: 4067.43,3407.79 4067.43,3387.79 4097.43,3368.08 4097.43,3426.55
  region net $1N21123: 4287.97,3404.81 4265.47,3423.56 4265.47,3371.06 4287.97,3389.81
  region net $1N21123: 4174.93,3404.81 4174.93,3389.81 4197.43,3371.06 4197.43,3423.56
  region net $1N21123: 4274.93,3404.81 4274.93,3389.81 4297.43,3371.06 4297.43,3423.56
  region net $1N21123: 4387.97,3404.81 4365.47,3423.56 4365.47,3371.06 4387.97,3389.81
  region net $1N21123: 4374.93,3404.81 4374.93,3389.81 4397.43,3371.06 4397.43,3423.56
  region net $1N21123: 4454.59,3449.05 4439.59,3449.05 4420.84,3426.55 4465.47,3426.55
  region net $1N563: 4370.35,3565.2 4340.35,3590.2 4340.35,3544.8 4370.35,3545.2
  region net VCCBAT: 3979.64,3567.79 3979.64,3547.79 4009.64,3544.8 4009.64,3592.79
  region net VCCBAT: 3851.76,3622.87 3830.55,3679.44 3783.01,3634.31 3833.26,3613.09
  region net VCCBAT: 3753.01,3667.79 3753.01,3647.79 3783.01,3634.31 3783.01,3692.79
  region net $1N562: 3942.7,3720.49 3922.7,3720.49 3899.45,3701.28 3946.99,3701.28
  region net VCCBAT: 3986.93,3567.79 3956.93,3586.81 3956.93,3522.79 3986.93,3547.79
  region net 3V3: 3819.37,4802.68 3831.87,4806.22 3796.87,4806.22 3809.37,4802.68
  region net $1N4383: 5137.01,4123.13 5122.01,4135.63 5122.01,4107.26 5137.01,4113.13
  region net 3V3: 5135,4184.95 5122.01,4198.33 5122.01,4166.58 5135,4169.95
  region net TXD0: 4766.2,4657.79 4774.46,4645.78 4774.46,4679.8 4766.2,4667.79
  region net $1N4471: 4874.66,4667.79 4865.54,4679.8 4865.54,4645.78 4874.66,4657.79
  region net RXD0: 4760.34,4597.79 4774.46,4585.78 4774.46,4619.8 4760.34,4607.79
  region net $1N4541: 4869.66,4607.79 4865.54,4619.8 4865.54,4585.78 4869.66,4597.79
  region net EN: 3789.12,4715.18 3820.54,4725.78 3788.78,4746.66 3778.18,4718.38
  region net 3V3: 3771.82,4757.2 3770.88,4770.41 3742.6,4759.8 3761.22,4725.78
  region net 3V3: 4897.16,4813.28 4905.54,4835.78 4873.78,4835.78 4882.16,4813.28
  region net IO0: 4825.34,4820.78 4835.34,4820.78 4846.22,4835.78 4814.46,4835.78
  region net IO0: 4803.86,4862.2 4814.46,4835.78 4828.08,4869.8 4803.86,4876.34
  region net IO0: 4774.88,4916.02 4784.88,4916.02 4797.38,4931.02 4762.38,4931.02
  region net EN: 3665,4911.02 3675,4911.02 3687.5,4926.02 3659.76,4926.02
  region net $1N8242: 4110.46,3807.41 4110.46,3827.41 4080.46,3833.16 4080.46,3801.66
  region net 3V3: 4192.01,3872.45 4192.01,3892.45 4162.01,3898.33 4162.01,3866.58
  region net $1N8242: 4097.99,3807.41 4127.99,3807.26 4127.99,3839.01 4097.99,3827.41
  region net IO2: 5002.99,4122.79 5002.99,4112.79 5017.99,4107.26 5017.99,4135.29
  region net $1N8352: 5040,4207.45 5030,4207.45 5017.99,4198.33 5052.01,4198.33
  region net 3V3: 3589.9,4595.66 3607.5,4560.9 3622.5,4560.9 3640.1,4595.66
  region net 3V3: 3914.33,4707.72 3914.33,4697.72 3924.34,4685.22 3924.34,4720.22
  region net 3V3: 4029.51,4695.22 4029.51,4710.22 4007.01,4721.42 4007.01,4684.02
  region net EN: 3909.34,4647.72 3924.34,4635.22 3924.34,4670.22 3909.34,4657.72
  region net EN: 4022.01,4647.72 4022.01,4657.72 4007.01,4670.22 4007.01,4635.22
  region net IO32: 3909.34,4407.79 3909.34,4397.79 3924.34,4385.29 3924.34,4420.29
  region net IO2: 4578.71,4037.88 4578.71,4047.88 4563.71,4060.38 4563.71,4025.38
  region net IO0: 4730.66,4097.72 4730.66,4107.72 4715.66,4120.22 4715.66,4085.22
  region net IO4: 4617.99,4157.79 4617.99,4147.79 4632.99,4135.29 4632.99,4170.29
  region net IO16: 4617.99,4207.72 4617.99,4197.72 4632.99,4185.22 4632.99,4220.22
  region net IO17: 4617.99,4257.79 4617.99,4247.79 4632.99,4235.29 4632.99,4270.29
  region net IO5: 4617.99,4297.79 4632.99,4285.29 4632.99,4320.29 4617.99,4307.79
  region net IO18: 4617.99,4357.79 4617.99,4347.79 4632.99,4335.29 4632.99,4370.29
  region net IO19: 4617.99,4407.79 4617.99,4397.79 4632.99,4385.29 4632.99,4420.29
  region net IO21: 4617.99,4507.79 4617.99,4497.79 4632.99,4485.29 4632.99,4520.29
  region net RXD0: 4726.27,4561.65 4726.27,4575.79 4704.22,4571.42 4715.66,4534.02
  region net TXD0: 4726.27,4615.79 4726.27,4629.93 4700.08,4621.42 4715.66,4584.02
  region net IO22: 4619.93,4647.72 4632.99,4635.22 4632.99,4670.22 4619.93,4657.72
  region net VIN: 4604.35,3940.82 4604.35,3960.82 4574.35,3964.05 4574.35,3937.59
  region net VBUS: 4873.62,3395.79 4858.62,3408.29 4858.62,3373.29 4873.62,3385.79
  region net 5V: 4827.5,3304.8 4811.38,3288.42 4858.62,3288.42 4842.5,3304.8
  region net DTR: 4907.45,4581.1 4920.25,4580.59 4920.25,4591.61 4907.45,4591.1
  region net $1N4541: 4902.93,4630.5 4902.93,4620.5 4920.25,4619.99 4920.25,4631.01
  region net $1N4471: 4902.93,4650.2 4902.93,4640.2 4920.25,4639.69 4920.25,4650.71
  region net $1N4383: 5154.02,4600.8 5154.02,4610.8 5141.51,4611.31 5141.51,4600.29
  region net 5V: 5124.3,4565.59 5134.3,4565.59 5146.8,4584.57 5111.8,4584.57
  region net 3V3: 5070.27,4551.78 5070.27,4541.78 5088.44,4529.28 5088.44,4564.28
  region net 3V3: 5084.97,4527.82 5094.97,4527.82 5095.49,4534.58 5084.46,4534.58
  region net 3V3: 5089.97,4551.78 5071.8,4564.28 5071.8,4529.28 5089.97,4541.78
  region net D-: 5045.57,4517.26 5055.57,4517.26 5056.09,4534.58 5045.06,4534.58
  region net D+: 5025.87,4517.26 5035.87,4517.26 5036.39,4534.58 5025.36,4534.58
  region net VIN: 4614.28,3943.75 4634.36,3935.06 4669.79,3935.06 4630.04,3956.27
  region net VIN: 4699.79,3907.79 4699.79,3927.79 4669.79,3935.06 4669.79,3903.57
  region net 3V3: 4267.72,3872.45 4267.72,3892.45 4237.72,3896.1 4237.72,3864.6
  region net 3V3: 4172.28,3872.45 4237.72,3864.6 4237.72,3896.1 4172.28,3892.45
  region net 3V3: 5130.49,4473.4 5115.49,4473.4 5106.26,4450.9 5139.72,4450.9
  region net 3V3: 5149.7,4389.97 5155.63,4405.25 5139.72,4450.9 5109.49,4403.66
  region net $1N8352: 5091.26,4243.3 5091.26,4233.3 5106.26,4220.8 5106.26,4255.8
  region net $1N21123: 3913.68,3330.6 3890.92,3309.44 3890.92,3266.14 3931,3319.63
  region net $1N20998: 3807.78,3462.79 3807.78,3452.79 3822.78,3446.91 3822.78,3475.29
  region net $1N21037: 3640.34,3444.8 3629.46,3429.8 3661.22,3429.8 3650.34,3444.8
  region net $1N20998: 3725.2,3440.41 3696.92,3429.8 3720.54,3403.92 3731.14,3432.2
  region net VCCBAT: 3399.99,3578.58 3377.48,3601.06 3377.48,3536.1 3399.99,3558.58
  region net 3V3: 5340.19,3817.24 5355.42,3854.57 5349.98,3863.27 5315.14,3857.29
  region net 3V3: 3363.62,4192.05 3345,4224.76 3335,4224.76 3316.38,4192.05
  region net IO32: 3360.83,3950.74 3393.54,3969.37 3393.54,3979.37 3360.83,3997.99
  region net 3V3: 4338.03,3872.45 4363.9,3882.22 4372.89,3917.45 4332.67,3892.45
  region net D+: 4835.99,4139.85 4840,4127.38 4850,4127.38 4854.01,4139.85
  region net D+: 4852.94,4213.79 4859.14,4217.79 4859.14,4227.79 4852.94,4231.8
  region net $1N21037: 4059.92,3756.54 4075.5,3757.79 4075.5,3777.79 4059.92,3779.04
  region net $1N21037: 3705.08,3509.04 3689.5,3507.79 3689.5,3487.79 3705.08,3486.54
  region net VIN: 4710.08,3929.04 4694.5,3927.79 4694.5,3907.79 4710.08,3906.54
  region net 5V: 5138.52,4551.24 5134.3,4563.48 5124.3,4562.89 5120.56,4550.19
  region net 5V: 4953.02,4503.54 4947.04,4491.9 4954.11,4484.83 4965.75,4490.81
  region net RTS: 4827.94,4723.79 4840.4,4727.79 4840.4,4737.79 4827.94,4741.79
  region net DTR: 4827.94,4533.79 4840.4,4537.79 4840.4,4547.79 4827.94,4551.79
  region net IO0: 4883.02,4488.54 4877.04,4476.9 4884.11,4469.83 4895.75,4475.81
  region net IO0: 4895.75,4759.77 4884.11,4765.75 4877.04,4758.68 4883.02,4747.04
  region net EN: 4057.01,4661.74 4044.57,4657.72 4044.63,4647.72 4057.12,4643.74
  region net $1N569: 4751,4019.85 4755,4007.39 4765,4007.39 4769,4019.85
  region net $1N569: 4887.94,4073.79 4900.4,4077.79 4900.4,4087.79 4887.94,4091.79
  region net $1N568: 4743.02,3783.54 4737.04,3771.9 4744.11,3764.83 4755.75,3770.81
  region net $1N567: 4746,3684.85 4750,3672.39 4760,3672.39 4764,3684.85
  region net $1N568: 4896.98,3907.04 4902.96,3918.68 4895.89,3925.75 4884.25,3919.77
  region net $1N567: 4896.98,3827.04 4900.56,3836.28 4893.49,3843.35 4884.25,3839.77
  region net 3V3: 5167.06,4851.79 5154.6,4850.29 5154.6,4835.29 5167.06,4833.79
  region net 3V3: 5184,4850.73 5180,4863.19 5170,4863.19 5166,4850.73
  region net 3V3: 5125.75,4504.77 5114.11,4510.75 5107.04,4503.68 5113.02,4492.04
  region net 3V3: 5114.8,4486.47 5115.49,4473.71 5130.49,4471.17 5132.54,4483.46
  region net IO4: 4537.94,4143.79 4550.4,4147.79 4550.4,4157.79 4537.94,4161.79
  region net IO22: 4541.98,4562.04 4547.96,4573.68 4540.89,4580.75 4529.25,4574.77
  region net IO21: 4537.94,4493.79 4550.4,4497.79 4550.4,4507.79 4537.94,4511.79
  region net IO19: 4537.94,4393.79 4550.4,4397.79 4550.4,4407.79 4537.94,4411.79
  region net IO18: 4537.94,4343.79 4550.4,4347.79 4550.4,4357.79 4537.94,4361.79
  region net IO5: 4537.94,4293.79 4550.4,4297.79 4550.4,4307.79 4537.94,4311.79
  region net IO17: 4537.94,4243.79 4550.4,4247.79 4550.4,4257.79 4537.94,4261.79
  region net IO16: 4537.88,4193.74 4550.37,4197.72 4550.43,4207.72 4537.99,4211.74
  region net 3V3: 4064.25,4690.81 4074.12,4683.06 4084.73,4693.67 4076.98,4703.54
  region net 3V3: 4057.01,4711.74 4044.55,4710.22 4044.65,4695.22 4057.12,4693.74
  region net 3V3: 4898.77,4810.98 4897.16,4823.4 4882.16,4822.98 4880.78,4810.47
  region net IO2: 4748.02,4083.54 4742.04,4071.9 4749.11,4064.83 4760.75,4070.81
  region net IO2: 4887.94,4108.79 4900.4,4112.79 4900.4,4122.79 4887.94,4126.79
  region net IO32: 3681.98,4317.04 3687.96,4328.68 3680.89,4335.75 3669.25,4329.77
  region net IO32: 3556,4309.85 3560,4297.39 3570,4297.39 3574,4309.85
  region net D+: 5114.53,3543.46 5113.62,3528.46 5125.44,3528.46 5124.53,3543.46
  region net D+: 5114.53,3462.32 5124.53,3462.32 5125.44,3477.28 5113.62,3477.28
  region net D-: 5105,3543.26 5095,3543.26 5093.93,3528.46 5105.75,3528.46
  region net D+: 5085.16,3462.63 5086.07,3477.28 5074.25,3477.28 5075.16,3462.63
  region net D-: 5065.47,3543.46 5055.47,3543.46 5054.56,3528.46 5066.38,3528.46
Bottom Layer:
  region net VIN: 3780,3332.79 3890,3332.79 3890,3427.79 3780,3427.79
  region net VIN: 3780,3263.97 3834.99,3263.97 3834.99,3339.37 3780,3339.37
  region net VIN: 5383.59,4060.15 5435,4111.55 5435,4005.67 5383.59,4057.08
  region net $1N5682: 4406.02,4612.79 4406.02,4602.79 4421.02,4596.61 4421.02,4624.17
  region net DTR: 4485.24,4680.19 4485.24,4690.19 4470.24,4698.97 4470.24,4671.41
  region net DTR: 4406.02,4692.79 4406.02,4682.79 4421.02,4671.41 4421.02,4698.97
  region net IO0: 4563.98,4652.79 4548.98,4661.57 4548.98,4634.01 4563.98,4642.79
  region net $1N5646: 4253.98,4680.19 4253.98,4690.19 4238.98,4698.97 4238.98,4671.41
  region net RTS: 4253.98,4615.39 4238.98,4624.17 4238.98,4596.61 4253.98,4605.39
  region net RTS: 4182.91,4634.78 4189.76,4610.25 4225.34,4624.17 4197.06,4634.78
  region net EN: 4096.02,4647.79 4111.02,4635.29 4111.02,4661.57 4096.02,4657.79
  region net DTR: 4390.54,4692.79 4375.54,4704.8 4375.54,4670.78 4390.54,4682.79
  region net $1N5646: 4269.46,4680.19 4284.46,4670.78 4284.46,4702.69 4269.46,4690.19
  region net RTS: 4269.46,4615.39 4269.46,4605.39 4284.46,4592.89 4284.46,4624.8
  region net $1N5682: 4390.54,4612.79 4375.54,4624.8 4375.54,4590.78 4390.54,4602.79
  region net 3V3: 3648.4,4615.7 3660.53,4652.71 3649.92,4663.32 3612.9,4651.19
  region net IO21: 3712.9,4584.39 3751.69,4574.03 3758.76,4581.1 3748.4,4619.89
  region net IO22: 3837.13,4592.69 3871.89,4612.79 3871.89,4622.79 3837.13,4642.89
  region net VIN: 3798.76,3331.89 3780.01,3295.21 3832.51,3295.21 3813.76,3331.89
  region net VIN: 5299.83,4537.67 5333.69,4524.96 5347.01,4539.92 5332.24,4574.05
  region net IO5: 5252.64,4860.43 5267.52,4847.93 5267.52,4882.93 5252.64,4870.43
  region net IO19: 3342.97,4694.58 3380.51,4684.42 3387.58,4691.49 3377.42,4729.03
  region net IO18: 3342.97,4596.16 3380.51,4586 3387.58,4593.07 3377.42,4630.61
  region net VIN: 3337.5,4475.17 3352.5,4475.17 3371.25,4497.67 3318.75,4497.67
  region net VIN: 5326.48,4035.79 5360.21,4050.15 5360.21,4070.15 5326.48,4084.51
  region net IO16: 5299.92,4190.66 5263.85,4196.79 5258.36,4188.15 5273.8,4149.54
  region net IO17: 5293.29,4287.3 5258.74,4291.12 5254.92,4280.8 5276.4,4241.6
  region net IO4: 5301.89,3758.23 5267.72,3763 5263.02,3753.56 5280.82,3715.95
  region net D+: 4854.01,4155.73 4850,4168.2 4840,4168.2 4835.99,4155.73
  region net D+: 4835.99,4214.85 4840,4202.38 4850,4202.38 4854.01,4214.85
  region net $1N21037: 4035.15,3769.94 4024.62,3758.27 4037.62,3742.98 4049.73,3752.79
  region net $1N21037: 3724.92,3486.54 3740.5,3487.79 3740.5,3507.79 3724.92,3509.04
  region net VIN: 4708.75,3907.87 4710,3892.29 4730,3892.29 4731.25,3907.87
  region net 5V: 5118.02,4543.54 5112.04,4531.9 5119.11,4524.83 5130.75,4530.81
  region net 5V: 4972.94,4493.79 4985.4,4497.79 4985.4,4507.79 4972.94,4511.79
  region net RTS: 4812.06,4741.79 4799.6,4737.79 4799.6,4727.79 4812.06,4723.79
  region net DTR: 4812.06,4551.79 4805.86,4547.79 4805.86,4537.79 4812.06,4533.79
  region net IO0: 4887.06,4496.79 4874.6,4492.79 4874.6,4482.79 4887.06,4478.79
  region net IO0: 4904,4495.73 4900,4508.19 4890,4508.19 4886,4495.73
  region net IO0: 4886,4739.85 4890,4727.39 4900,4727.39 4904,4739.85
  region net EN: 4072.94,4643.79 4085.4,4647.79 4085.4,4657.79 4072.94,4661.79
  region net $1N569: 4771.98,4027.04 4777.96,4038.68 4770.89,4045.75 4759.25,4039.77
  region net $1N569: 4872.06,4091.79 4859.6,4087.79 4859.6,4077.79 4872.06,4073.79
  region net $1N568: 4766.98,3782.04 4772.96,3793.68 4765.89,3800.75 4754.25,3794.77
  region net $1N567: 4766.67,3695.6 4771.45,3707.17 4762.2,3712.06 4750.75,3704.01
  region net $1N568: 4873.78,3912.04 4865.73,3900.59 4870.62,3891.34 4882.19,3896.12
  region net $1N567: 4873.02,3828.54 4867.04,3816.9 4874.11,3809.83 4885.75,3815.81
  region net 3V3: 5163.02,4843.54 5155.27,4833.67 5165.88,4823.06 5175.75,4830.81
  region net 3V3: 5136.98,4492.04 5144.73,4501.91 5134.12,4512.52 5124.25,4504.77
  region net IO4: 4521,4144.85 4525,4132.39 4535,4132.39 4539,4144.85
  region net VIN: 3850.08,3414.04 3834.5,3410.29 3834.5,3395.29 3850.08,3391.54
  region net VIN: 3814.92,3391.54 3830.5,3395.29 3830.5,3410.29 3814.92,3414.04
  region net VIN: 3795.08,3414.04 3779.5,3410.29 3779.5,3395.29 3795.08,3391.54
  region net IO22: 4522.06,4571.79 4509.6,4567.79 4509.6,4557.79 4522.06,4553.79
  region net IO21: 4530.75,4514.77 4519.11,4520.75 4512.04,4513.68 4518.02,4502.04
  region net IO19: 4522.06,4411.79 4509.6,4407.79 4509.6,4397.79 4522.06,4393.79
  region net IO18: 4522.06,4361.79 4509.6,4357.79 4509.6,4347.79 4522.06,4343.79
  region net IO5: 4541.98,4302.04 4547.96,4313.68 4540.89,4320.75 4529.25,4314.77
  region net IO17: 4541.98,4252.04 4547.96,4263.68 4540.89,4270.75 4529.25,4264.77
  region net IO16: 4541.98,4202.04 4547.96,4213.68 4540.89,4220.75 4529.25,4214.77
  region net 3V3: 4057.06,4711.79 4044.6,4710.29 4044.6,4695.29 4057.06,4693.79
  region net 3V3: 4076.98,4702.04 4084.73,4711.91 4074.12,4722.52 4064.25,4714.77
  region net 3V3: 4878.02,4803.54 4870.27,4793.67 4880.88,4783.06 4890.75,4790.81
  region net IO2: 4771.98,4082.04 4777.96,4093.68 4770.89,4100.75 4759.25,4094.77
  region net IO2: 4872.06,4126.79 4859.6,4122.79 4859.6,4112.79 4872.06,4108.79
  region net IO32: 3662.06,4326.79 3649.6,4322.79 3649.6,4312.79 3662.06,4308.79
  region net IO32: 3572.94,4308.79 3585.4,4312.79 3585.4,4322.79 3572.94,4326.79